# Altium PCB Inc_filter_v1.PcbDoc (part 2 of 4)
Units mil, origin at the board's own origin, x right, y up, seen from the top; angles counter-clockwise.
Board outline 13370 x 13370 mil, 2 copper layers (Top Layer, Bottom Layer); 602 components, 261 nets, 1625 pads, 355 vias.
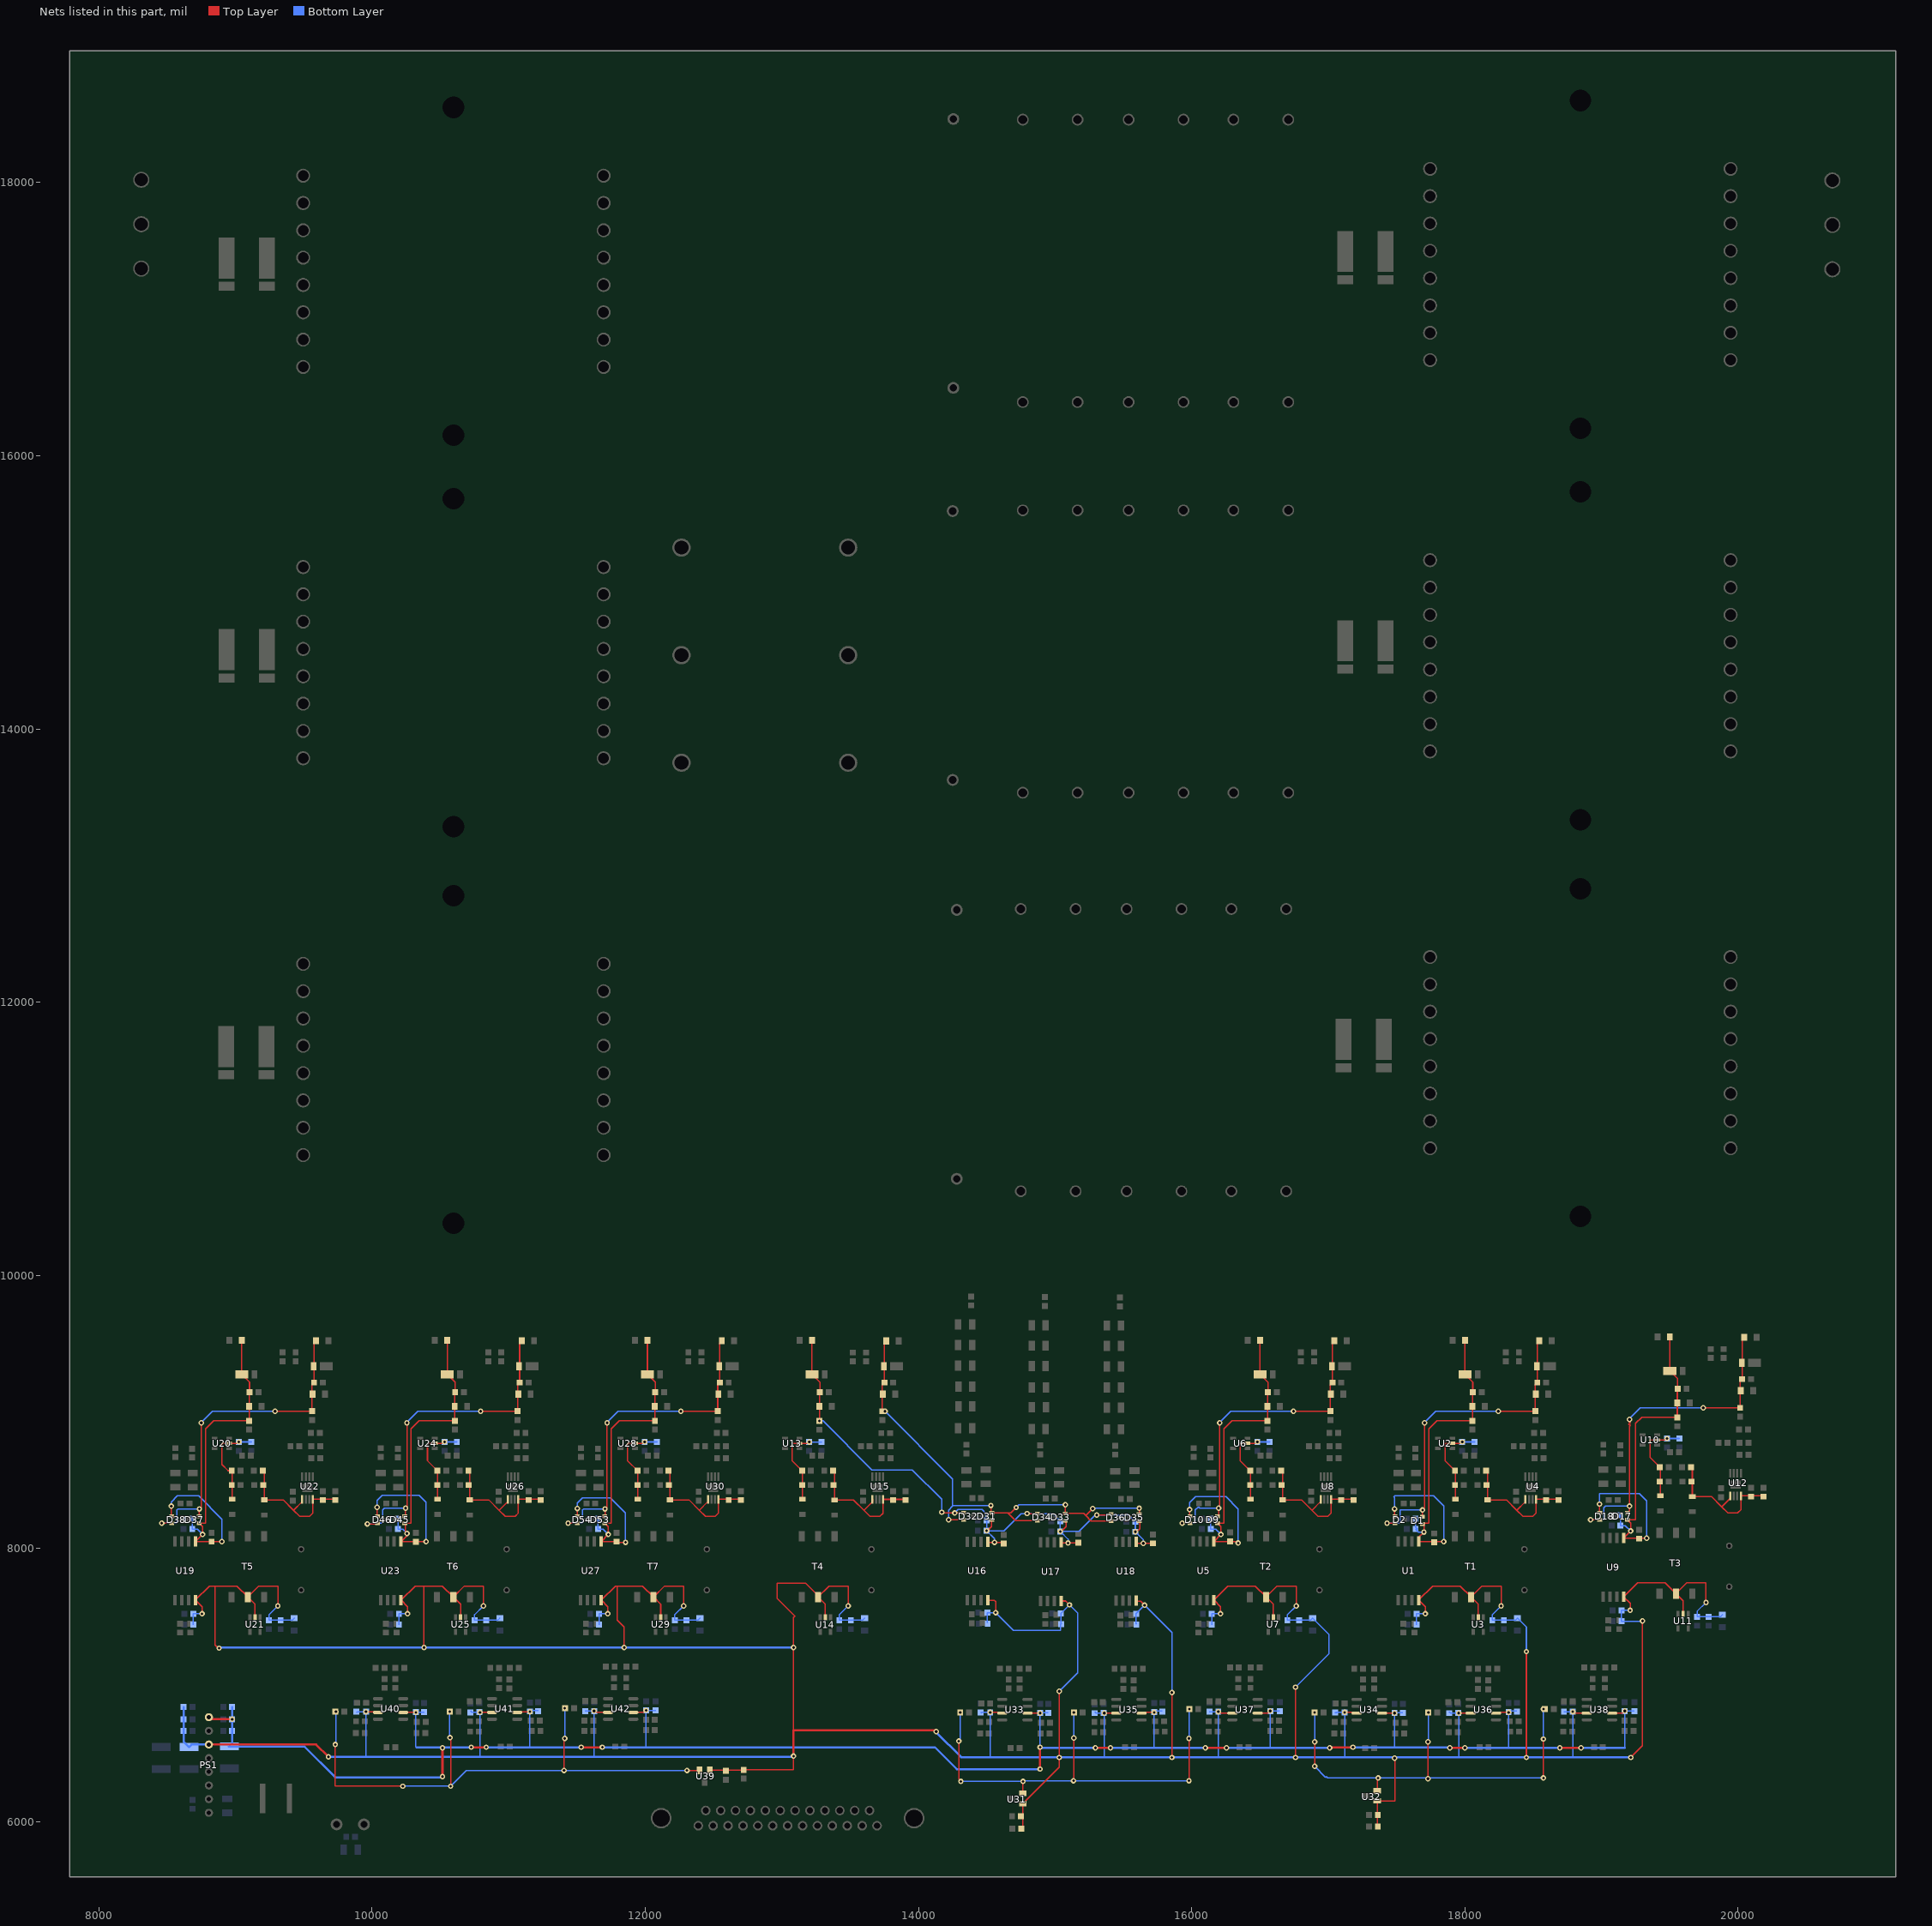
[diagram p2: the nets of this part, all layers, seen from the top]

## Footprints (in the part's own frame and the unit in brackets; to place one, negate y for a bottom-side part, rotate by r counter-clockwise, add the part's x,y. Pads: shape width x height; smd on the part's side, far side on the other; paste and mask are expansions set on the pad) (continued)
"Res Precision CSM3637Z" [mm]
  rect 7.62x2.95 smd: 1(0,0) 4(0,7.47)
  rect 1.68x2.95 smd: 2(5.26,0) 3(5.26,7.47)
  silkscreen extent -4.4,-2 6.6,9.5
SO8_L [mm] "SOIC, 8-Leads, Body 4.9x3.9mm, Pitch 1.27mm, IPC High Density"
  oval 1.9x0.6 smd: 1(-2.35,1.905) 2(-2.35,0.635) 3(-2.35,-0.635) 4(-2.35,-1.905) 5(2.35,-1.905) 6(2.35,-0.635) 7(2.35,0.635) 8(2.35,1.905)
  silkscreen extent -2.47,-2.5 1,2.88, body extent -2,-2.5 2,2.5, height 1.75
SOD-123 [mm]
  rect 0.91x1.22 smd: 1(0,0) 2(2.815,0)
  silkscreen extent 1.14,-0.33 1.5,0.33
SOIC8 [mm]
  rect 0.64x1.905 smd mask+0.076: 1(0,0) 2(1.27,0) 3(2.54,0) 4(3.81,0) 5(3.81,10.9) 6(2.54,10.9) 7(1.27,10.9) 8(0,10.9)
  silkscreen extent -1.3,0.3 4.57,9.6
SOT23-5 [mm] "SOT23-5 for REF2030, TI"
  rect 0.6x1.1 smd: 1(-0.95,-1.35) 2(0,-1.35) 3(0.95,-1.35) 4(0.95,1.35) 5(-0.95,1.35)
  silkscreen extent -2.29,-1.77 1.78,2.03
SOT323_ESD [mm]
  rect 0.7x0.9 smd: 1(-0.65,-1.9) 2(0.65,-1.9) C(0,-0.1)
  silkscreen extent -1.5,-1.6 1.5,-0.3
SOT_23 [mm]
  rect 1x1.4 smd: 1(-0.95,-1.1) 2(0.95,-1.1) 3(0,1.1)
  round 0.4 on Top Overlay: ""(-1.27,0.127)
  silkscreen extent -1.78,-2.16 1.78,2.16, body extent -1.48,-1.28 1.52,0.97, height 1.25
"Terminal Barrier 3PIN" [mm] "OSTYC022150 terminal"
  round 3 hole 2.4: 1(0,0) 2(8.26,0) 3(16.52,0)
  silkscreen extent -5.9,-9.9 22.6,2.7
"Xmr SN6501" [mm] "Xmr SN6501"
  rect 1.9x1.14 smd: 1(0,0) 2(0,-3.05) 3(0,-6.1) 4(11.31,-6.1) 5(11.31,-3.05) 6(11.31,0)
  silkscreen extent 0,-6.7 9.4,1.4

## Part data
C1 C2 C3 C4 C5 C6 C7 C8 C9: "Radial - 4 Leads"
C10 C11 C35 C36 C60 C61 C105 C106 C110 C111 C115 C116 C120 C121 C145 C146 C170 C171: "CAP CER 1UF 50V X5R 0603", part=1276-1860-1-ND
C12 C13 C18 C20 C22 C25 C27 C29 C31 C37 C38 C43 C45 C47 C50 C52 C54 C56 C62 C63 C68 C70 C72 C75 C77 C79 C81 C88 C90 C92 C95 C97 C99 C101 C107 C108 C112 C113 C117 C118 C122 C123 C128 C130 C132 C135 C137 C139 C141 C147 C148 C153 C155 C157 C160 C162 C164 C166 C172 C173 C178 C180 C182 C185 C187 C189 C191 C199 C200 C203 C207 C209 C212 C213 C214 C216 C218 C220 C226 C227 C228 C230 C232 C234 C240 C241 C242 C244 C246 C248 C253 C255 C256 C258 C262 C263 C265 C269 C270 C272 C276: "CAP CER 0.1UF 50V Y5V 0603", part=311-1343-6-ND
C14 C39 C64 C109 C114 C119 C124 C149 C174: "CAP CER 330PF 50V C0G 0603", part=445-7033-2-ND
C15 C40 C65 C85 C125 C150 C175: library part Cap, "CAP CER 1000PF 1KV Y5P RADIAL", LatestRevisionDate=17-Jul-2002, LatestRevisionNote="Re-released for DXP Platform.", PackageDescription="Radial Cap, Thru-Hole; 2 Leads; 0.3 in Pin Spacing", PackageReference=RAD-0.3, part=1251PH-ND, Published=8-Jun-2000, Publisher="Altium Limited"
C16 C19 C21 C24 C26 C28 C33 C41 C44 C46 C49 C51 C53 C58 C66 C69 C71 C74 C76 C78 C83 C86 C89 C91 C94 C96 C98 C103 C126 C129 C131 C134 C136 C138 C143 C151 C154 C156 C159 C161 C163 C168 C176 C179 C181 C184 C186 C188 C193 C202 C205 C206 C208 C215 C217 C219 C221 C229 C231 C233 C235 C243 C245 C247 C249 C252 C257 C259 C264 C266 C271 C273: "CAP CER 10UF 35V X5R 0805", part=490-10515-1-ND
C17 C42 C67 C87 C127 C152 C177: "CAP CER 22UF 35V X5R 0805", part=445-14428-1-ND
C23 C32 C48 C57 C73 C82 C93 C102 C133 C142 C158 C167 C183 C192: "CAP CER 4.7UF 50V X5R 0805", part=445-5980-1-ND
C30 C34 C55 C59 C80 C84 C100 C104 C140 C144 C165 C169 C190 C194: "CAP CER 10000PF 100V X7R 0603", part=478-7418-1-ND
C195 C196 C197: library part "Cap 3kV 220pF", "CAP CER 220PF 3KV C0G 1812", part=445-2380-1-ND
C198 C275: "CAP CER 10UF 50V X5R 1206", part=587-3248-1-ND
C201 C204: "CAP CER 0603 10NF 50V U2J 5%", part=399-13384-1-ND
C210 C211 C222 C223 C224 C225 C236 C237 C238 C239 C250 C251 C254 C260 C261 C267 C268 C274 R106 R107 R110 R111 R112 R113 R116 R118 R122 R123 R126 R127 R128 R129 R132 R134 R138 R139 R142 R143 R144 R145 R148 R150 R153 R155 R156 R158 R161 R163 R164 R166 R169 R171 R172 R174: "NC"
D1 D2 D9 D10 D17 D18 D31 D32 D33 D34 D35 D36 D37 D38 D45 D46 D53 D54: library part Diode_ESD, "TVS DIODE 70VWM 8VC SOT323", part=DESD1P0RFW-7DICT-ND
D3 D6 D11 D14 D19 D22 D25 D28 D39 D42 D47 D50 D55 D58: "DIODE SCHOTTKY 20V 500MA SOD123", part=MBR0520LT1GOSCT-ND
D4 D7 D12 D15 D20 D23 D26 D29 D40 D43 D48 D51 D56 D59: "LED 0805"
D5 D8 D13 D16 D21 D24 D27 D30 D41 D44 D49 D52 D57 D60: "DIODE ZENER POWERDI123"
FB1 FB2 FB3 FB4 FB5 FB6 FB7 FB8 FB9 FB10 FB11 FB12 FB13 FB14 FB15 FB16 FB17 FB18 FB19 FB20 FB21 FB22 FB23 FB24 FB25 FB26 FB27 FB28 FB29: "FERRITE BEAD 1 KOHM 0603 1LN", part=445-8672-1-ND
J1: library part "Conn D-Sub Receptacle 25 positions", "D-Sub Receptacle 25 Position A35111-ND"
L5: library part "CMC 1.5MH 20A", "CMC 1.5MH 20A 3LN TH", part=B82747E6203A40
L8: "FIXED IND 10UH 1.19A 110 MOHM", part=732-1103-1-ND
P1: library part "2 pin Terminal", "2 pin Terminal"
P2 P3: library part "Terminal Blocks - Barrier Blocks", "CONN BARRIER STRIP 3CIRC 0.325\"", part=WM4246-ND
PS1: "DC/DC CONVERTER +/-5V 6W", part=1470-2542-5-ND
R1 R2 R4 R5 R7 R8: "RES SMD 0.02 OHM 0.1% 2W 3637", part=Y1473-.02CCT-ND
R3 R6 R9: "RES 5.0 OHM 10W 1% WW AXIAL", part=RSD-5.0RCT-ND
R10 R19 R28 R41 R53 R65 R77 R86 R95: library part "Resistor 0603", "Resistor 0603"
R11 R14 R20 R23 R29 R32 R44 R52 R56 R64 R68 R76 R78 R81 R87 R90 R96 R99: "12 Ohm ∮0.5% 0.25W, 1/4W Chip Resistor 1206", part=311-2961-1-ND
R12 R13 R21 R22 R30 R31 R45 R48 R57 R60 R69 R72 R79 R80 R88 R89 R97 R98: "RES SMD 10 OHM 0.05% 1/10W 0603", part=RNCF0603AKT10R0CT-ND
R15 R17 R24 R26 R33 R35 R37 R39 R82 R84 R91 R93 R100 R102: "RES SMD 3.9K OHM 5% 1/10W 0603", part=541-3.9KGCT-ND
R16 R25 R34 R38 R83 R92 R101: "RES SMD 3.16K OHM 1% 1/10W 0603", part=311-3.16KHRCT-ND
R18 R27 R36 R40 R85 R94 R103: "RES SMD 11.5K OHM 1% 1/10W 0603", part=541-11.5KHCT-ND
R42 R43 R49 R50 R54 R55 R61 R62 R66 R67 R73 R74: "RES SMD 332K OHM 0.1% 1/4W 1206", part=RG32P332KBCT-ND
R46 R58 R70: "RES SMD 1.13K OHM 0.1% 1/4W 1206", part=P1.13KBCCT-ND
R104 R105 R108 R109 R114 R115 R117 R119 R120 R121 R124 R125 R130 R131 R133 R135 R136 R137 R140 R141 R146 R147 R149 R151 R152 R154 R157 R159 R160 R162 R165 R167 R168 R170 R173 R175: "RES SMD 499 OHM 0.1% 1/10W 0603", part=RG16P499BCT-ND
T1 T2 T3 T4 T5 T6 T7: "TRANSFORMER SMD TR1.7 SN6501", part=1297-1107-1-ND
U1 U5 U9 U16 U17 U18 U19 U23 U27: "IC OPAMP ISOLATION 100KHZ 8SOIC", part=296-38822-5-ND
U2 U6 U10 U13 U20 U24 U28: "IC REG LDO 5V 0.15A SOT23-5", part=296-39287-1-ND
U3 U7 U11 U14 U21 U25 U29: "IC REG CONV PWR SUPPLIES SOT23-5"
U4 U8 U12 U15 U22 U26 U30: "IC REG LDO NEG ADJ 0.2A 8MSOP", part=296-27750-1-ND
U31 U32 U39: "Series Voltage Reference IC ∮0.2% 25mA SOT-23-3", part=ISL21010CFH315Z-TKCT-ND
U33 U34 U35 U36 U37 U38 U40 U41 U42: "IC OPAMP DIFF 360MHZ 8MSOP", part=AD8132WARMZ-R7CT-ND

## Via types
v1: diameter 40, hole 20, Top Layer to Bottom Layer, 355 vias

## Nets (pads, with @x,y where several pads share a name; then routed paths per layer and width w, separated by ;. In a path a pad name is that pad's centre, name@x,y a point inside that pad or via, vN(x,y) a via of type N, cw(c..) or ccw(c..) an arc to the next point about the centre after c; other vN are vias at no path point)
1V5_IL: R107.1 R123.1 R139.1 U32.2 | length 3204.7
  Top Layer w7.87: v1@16900,6410 v1(16900,6585) ; v1@17355,6330 v1(17365,6320) ; U32.2@17358.31,6227.4 v1@17358.31,6320 ; v1(17730,6315) v1(17730,6585) ; v1(18575,6320) v1(18575,6605) ; v1(18575,6825) R139.1@18577.52,6825
  Bottom Layer w7.87: v1(16900,6405) 16980,6325 16985,6330 16995,6320 v1(17365,6320) v1(18575,6320) ; v1(16900,6585) v1(16900,6800) ; v1(17730,6585) 17732.52,6587.52 v1(17732.52,6800) ; v1(18575,6605) v1(18575,6825)
1V5_Io: R153.1 R161.1 R169.1 U39.2 | length 4276.4
  Top Layer w7.87: v1(9730,6565) 9730,6260 v1(10225,6260) ; v1(10570,6615) 10580,6605 10575,6600 v1(10575,6260) ; v1(11405,6375) 11405,6595 11400,6600 v1(11410,6610) ; v1(12305,6375) 12395.98,6375 U39.2@12397.6,6376.61
  Bottom Layer w7.87: v1(9730,6565) 9735.04,6570.04 v1(9735.04,6805) ; v1(10225,6260) v1(10575,6260) 10690,6375 v1(11405,6375) v1(12305,6375) ; v1(10567.56,6805) 10567.56,6617.44 v1(10570,6615) ; v1(11410,6610) v1(11410,6610) v1(11410.04,6830)
1V5_Vo: R106.1 R122.1 R138.1 U31.2 | length 3310.4
  Top Layer w7.87: v1(14295,6590) 14295,6310 v1(14310,6295) ; U31.2@14763.31,6207.4 14765,6209.09 v1(14765,6295) ; v1(15135,6300) 15137.52,6302.52 v1(15137.52,6612.52) ; v1(15980,6300) v1(15980,6610) ; R138.1@15980,6825 v1(15982.52,6825)
  Bottom Layer w7.87: v1(14295,6590) 14305,6600 v1(14305,6800) ; v1(14310,6295) v1(14765,6295) 14770,6300 v1(15135,6300) v1(15980,6300) ; v1(15137.52,6612.52) v1(15137.52,6800) ; v1(15980,6610) 15982.52,6607.48 v1(15982.52,6825)
+5V_LV: C11.1 C13.1 C16.2 C17.2 C18.2 C36.1 C38.1 C41.2 C42.2 C43.2 C61.1 C63.1 C66.2 C67.2 C68.2 C86.2 C87.2 C88.2 C106.1 C108.1 C111.1 C113.1 C116.1 C118.1 C121.1 C123.1 C126.2 C127.2 C128.2 C146.1 C148.1 C151.2 C152.2 C153.2 C171.1 C173.1 C176.2 C177.2 C178.2 C195.2 C200.2 C201.2 C202.2 C206.2 C207.2 C208.2 C209.2 C214.2 C215.2 C216.2 C217.2 C228.2 C229.2 C230.2 C231.2 C242.2 C243.2 C244.2 C245.2 C252.2 C253.2 C256.2 C257.2 C263.2 C264.2 C270.2 C271.2 PS1.6 T1.2 T2.2 T3.2 T4.2 T5.2 T6.2 T7.2 U1.8 U3.2 U5.8 U7.2 U9.8 U11.2 U14.2 U16.8 U17.8 U18.8 U19.8 U21.2 U23.8 U25.2 U27.8 U29.2 U31.1 U32.1 U33.3 U34.3 U35.3 U36.3 U37.3 U38.3 U39.1 U40.3 U41.3 U42.3 | length 42458.4
  Top Layer w7.87: v1(8754.72,7521.96) 8754.72,7573.96 U19.8@8706.72,7621.96 8809.76,7725 8850,7725 ; v1(8880,7270) 8880,7265 8850,7295 8850,7725 ; T5.2@9090,7645 9010,7725 8850,7725 ; v1(9955.04,6805) 10037.52,6805 U40.3@10042.52,6800 ; v1(10259.72,7521.96) 10259.72,7573.96 U23.8@10211.72,7621.96 10314.76,7725 10375,7725 ; v1(10380,7275) 10380,7720 10375,7725 ; T6.2@10595,7645 10515,7725 10375,7725 ; v1(10790.04,6800) U41.3@10877.52,6800 ; v1(11625.04,6810) 11635.04,6800 U42.3@11727.52,6800 ; v1(11725,7521.96) 11725,7573.96 U27.8@11677,7621.96 11780.04,7725 11795,7725 ; v1(11845,7275) 11845,7425 11795,7475 11795,7725 ; T7.2@12060.28,7645 11980.28,7725 11795,7725 ; v1(14525,6800) 14607.48,6800 U33.3@14612.48,6795 ; v1(15360,6795) U35.3@15447.48,6795 ; v1(16195,6805) 16205,6795 U37.3@16297.48,6795 ; v1(16210,7521.96) 16210,7573.96 U5.8@16162,7621.96 16265.04,7725 16465.28,7725 T2.2@16545.28,7645 ; v1(17120,6800) 17202.48,6800 U34.3@17207.48,6795 ; v1(17710,7521.96) 17710,7573.96 U1.8@17662,7621.96 17765.04,7725 17965.28,7725 T1.2@18045.28,7645 ; v1(17955,6795) U36.3@18042.48,6795 ; v1(18790,6805) 18800,6795 U38.3@18892.48,6795 ; v1(19209.72,7546.96) 19209.72,7598.96 U9.8@19161.72,7646.96 19264.76,7750 19465,7750 T3.2@19545,7670 ; v1(19215,6470) 19300,6555 v1(19300,7470)
  Top Layer w10: U21.2@9142.6,7496.3 9142.6,7592.4 T5.2@9090,7645 9170,7725 9310,7725 v1(9310,7580) ; U25.2@10647.6,7496.3 10647.6,7592.4 T6.2@10595,7645 10675,7725 10815,7725 v1(10815,7580) ; U29.2@12112.87,7496.3 12112.87,7592.4 T7.2@12060.28,7645 12140.28,7725 12280.28,7725 v1(12280.28,7580) ; U39.1@12472.4,6376.61 12705.87,6376.61 C253.2@12720,6362.48 ; C253.2@12720,6380 13085,6380 v1(13085,6480) ; 13085,6670 v1(13085,7275) 13085,7495 13095,7505 12965,7635 12965,7745 13175,7745 13265,7655 T4.2@13265,7644.72 ; U14.2@13317.6,7496.02 13317.6,7592.13 T4.2@13265,7644.72 ; v1(13485,7579.72) 13485,7724.72 13345,7724.72 T4.2@13265,7644.72 ; v1@14120,6670 v1(14130,6660) ; U16.8@14506.18,7620.87 14555,7620.87 14565,7610.87 v1(14565,7530) ; C207.2@14752.48,5950 14763.31,5960.83 U31.1@14763.31,6132.6 15030,6399.29 v1(15030,6470) v1(15030,6955) ; U17.8@15044.96,7615.83 15076.61,7615.83 v1(15104.96,7587.48) ; U18.8@15595,7613.35 15626.65,7613.35 v1(15655,7585) ; v1(15855,6470) v1(15855,6945) ; U7.2@16597.87,7496.3 16597.87,7592.4 T2.2@16545.28,7645 16625.28,7725 16765.28,7725 v1(16765.28,7580) ; v1(16760,6470) v1(16760,6985) ; C209.2@17362.48,5965 17358.31,5969.17 U32.1@17358.31,6152.6 17487.6,6152.6 17487.6,6462.4 v1(17485,6465) ; U3.2@18097.87,7496.3 18097.87,7592.4 T1.2@18045.28,7645 18125.28,7725 18265.28,7725 v1(18265.28,7580) ; v1(18450,6470) v1(18450,7245) ; U11.2@19597.6,7521.3 19597.6,7617.4 T3.2@19545,7670 19625,7750 19765,7750 v1(19765,7605)
  Top Layer w15.75: PS1.6@8805,6565 9590,6565 v1(9680,6475) ; v1(13085,6480) 13085,6670 v1@14120,6670
  Bottom Layer w7.87: C121.1@8691.2,7441.96 C123.1@8691.2,7521.96 v1(8754.72,7521.96) ; C256.2@9885.04,6805 9890.04,6800 9895.04,6805 v1(9955.04,6805) 9955.04,6475 ; C146.1@10196.2,7441.96 C148.1@10196.2,7521.96 v1(10259.72,7521.96) ; C263.2@10720.04,6810 10730.04,6800 v1(10790.04,6800) 10790.04,6475 ; C270.2@11560.04,6810 v1(11625.04,6810) 11625.04,6475 ; C171.1@11661.48,7441.96 C173.1@11661.48,7521.96 v1(11725,7521.96) ; C214.2@14455,6800 14460,6795 14465,6800 v1(14525,6800) 14525,6470 ; C108.1@14503.66,7530 v1(14565,7530) 14695,7400 15040,7400 15040,7445 C111.1@15044.96,7449.96 ; C228.2@15290,6805 15300,6795 v1(15360,6795) 15360,6470 ; C242.2@16130,6805 v1(16195,6805) 16195,6470 ; C36.1@16146.48,7441.96 C38.1@16146.48,7521.96 v1(16210,7521.96) ; C216.2@17050,6800 17055,6795 17060,6800 v1(17120,6800) 17120,6470 ; C11.1@17646.48,7441.96 C13.1@17646.48,7521.96 v1(17710,7521.96) ; C230.2@17885,6805 17895,6795 v1(17955,6795) 17955,6470 ; C244.2@18725,6805 v1(18790,6805) 18790,6470 ; v1(19209.72,7546.96) C63.1@19146.2,7546.96 C61.1@19146.2,7466.96 19296.96,7466.96 v1(19300,7470)
  Bottom Layer w10: v1(9310,7580) 9245,7515 C128.2@9245,7474.96 C126.2@9330,7474.96 9414.68,7474.96 C127.2@9430,7490.28 ; v1(10815,7580) 10750,7515 C153.2@10750,7474.96 C151.2@10835,7474.96 10919.68,7474.96 C152.2@10935,7490.28 ; v1(12280.28,7580) 12215.28,7515 C178.2@12215.28,7474.96 C176.2@12300.28,7474.96 12384.96,7474.96 C177.2@12400.28,7490.28 ; v1(13085,6480) v1@13090,6475 ; v1(13485,7579.72) 13420,7514.72 C88.2@13420,7474.69 C86.2@13505,7474.69 13589.68,7474.69 C87.2@13605,7490 ; C106.1@14503.66,7457.52 C108.1@14503.66,7530 ; v1(15030,6955) 15165,7090 15165,7527.44 v1(15104.96,7587.48) C113.1@15042.44,7524.96 15042.44,7452.48 C111.1@15044.96,7449.96 ; C116.1@15595,7447.48 15592.48,7450 C118.1@15592.48,7522.48 v1(15655,7585) 15855,7385 v1(15855,6945) ; v1(16760,6985) 17005,7230 17005,7370.55 C42.2@16885.28,7490.28 16869.96,7474.96 C41.2@16785.28,7474.96 C43.2@16700.28,7474.96 16700.28,7515 v1(16765.28,7580) ; v1(18265.28,7580) 18200.28,7515 C18.2@18200.28,7474.96 C16.2@18285.28,7474.96 18369.96,7474.96 C17.2@18385.28,7490.28 18450,7425.55 v1(18450,7245) ; v1(19765,7605) 19700,7540 C68.2@19700,7499.96 C66.2@19785,7499.96 19869.69,7499.96 C67.2@19885,7515.28
  Bottom Layer w15.75: C200.2@8620,6840 C202.2@8620,6750 C201.2@8620,6665 8620,6586.42 C195.2@8660,6546.42 8678.58,6565 PS1.6@8805,6565 PS1.6@8790,6550 ; v1(8880,7270) 8885,7275 v1(10380,7275) v1(11845,7275) v1(13085,7275) ; v1(9680,6475) 9955.04,6475 10790.04,6475 11625.04,6475 v1@13090,6475 ; v1@14135,6650 14310,6475 14310,6470 14525,6470 v1(15030,6470) 15360,6470 v1(15855,6470) 16195,6470 v1(16760,6470) 17120,6470 17955,6470 v1(18450,6470) 18790,6470 v1(19215,6470)
+5V_PH: C92.2 C93.2 C105.2 C107.2 C110.2 C112.2 C115.2 C117.2 D26.A D27.1 D31.1 D32.1 D33.1 D34.1 D35.1 D36.1 FB13.2 R41.2 R53.2 R65.2 U16.1 U17.1 U18.1 | length 4980.1
  Top Layer w7.87: v1(14170,8265) 14175,8260 v1(14265,8260) D32.1@14325,8260 ; v1(14498.66,8130) 14504.72,8130 14535.87,8161.14 D31.1@14535.87,8209.41 ; v1(14795,8255.59) D34.1@14869.13,8255.59 ; v1(15037.44,8124.96) 15045.04,8124.96 15080,8159.92 15080,8189.92 15069.96,8199.96 D33.1@15075,8205 ; v1(15305,8245) 15401.06,8245 D36.1@15409.13,8253.07 ; v1(15587.48,8122.48) 15597.48,8122.48 15620,8145 15620,8197.76 D35.1@15615.87,8201.89
  Top Layer w10: D26.A@13220.28,9524.72 13220,9524.45 D27.1@13220,9274.72 13277.52,9217.2 C92.2@13277.52,9144.72 13275,9142.2 v1(13275,8934.68) ; U16.1@14506.18,8050 14506.18,8035 14516.18,8045 v1(14556.18,8045) R41.2@14616.22,8045 ; U17.1@15044.96,8044.96 15044.96,8029.96 15054.96,8039.96 v1(15094.96,8039.96) R53.2@15155,8039.96 ; U18.1@15595,8042.48 15595,8027.48 15605,8037.48 v1(15645,8037.48) R65.2@15705.04,8037.48
  Bottom Layer w7.87: v1(13275,8934.68) 13300.32,8934.68 13660,8575 13954.72,8575 14170,8359.72 v1(14170,8265) ; v1(14265,8260) 14290,8285 14465,8285 14495,8255 14495,8208.66 C107.2@14498.66,8205 ; v1(14498.66,8130) 14625,8130 14750.59,8255.59 v1(14795,8255.59) 14981.81,8255.59 C112.2@15037.44,8199.96 ; v1(15037.44,8124.96) 15175.04,8124.96 15295,8244.92 15299.92,8240 15304.92,8245 v1(15305,8245) 15539.96,8245 C117.2@15587.48,8197.48 ; v1(15587.48,8122.48) C115.2@15595,8130
  Bottom Layer w10: C107.2@14498.66,8205 v1(14498.66,8130) 14556.18,8072.48 v1(14556.18,8045) ; C112.2@15037.44,8199.96 v1(15037.44,8124.96) 15094.96,8067.44 v1(15094.96,8039.96) ; C117.2@15587.48,8197.48 v1(15587.48,8122.48) 15645,8064.96 v1(15645,8037.48)
+5V_USH1: C35.2 C37.2 C47.2 C48.2 D9.1 D10.1 D12.A D13.1 FB7.2 R19.2 U5.1 | length 2973.1
  Top Layer w7.87: v1(15985,8285) 15985,8237.69 D10.1@15987.13,8235.55 ; v1(16340,8040) 16330.04,8049.96 16270,8049.96 16268.87,8051.09 U5.1@16162,8051.09 v1(16214,8103.09) 16214,8159.24 D9.1@16188.87,8184.37 16235,8184.37 16235,8875 16294.96,8934.96 FB7.2@16555.28,8934.96
  Top Layer w10: D12.A@16500.55,9525 16500.28,9524.72 D13.1@16500.28,9275 16557.8,9217.48 C47.2@16557.8,9145 16555.28,9142.48 FB7.2@16555.28,8934.96
  Bottom Layer w7.87: v1(15985,8285) 15985,8335 16030,8380 16250,8380 16340,8290 v1(16340,8040) ; C35.2@16138.96,8217.96 C37.2@16138.96,8141.96 16175.13,8141.96 v1(16214,8103.09)
+5V_USH2: C120.2 C122.2 C132.2 C133.2 D37.1 D38.1 D40.A D41.1 FB20.2 R77.2 U19.1 | length 2956.6
  Top Layer w7.87: v1(8530,8310) 8530,8237.41 D38.1@8531.86,8235.55 ; v1(8900,8050) 8824.68,8050 8819.68,8045 8813.59,8051.09 U19.1@8706.72,8051.09 v1(8758.72,8103.09) 8758.72,8159.24 D37.1@8733.59,8184.37 8780,8184.37 8780,8875.28 8839.68,8934.96 FB20.2@9100,8934.96
  Top Layer w10: D40.A@9045.28,9525 9045,9524.72 D41.1@9045,9275 9102.52,9217.48 C132.2@9102.52,9145 9100,9142.48 FB20.2@9100,8934.96
  Bottom Layer w7.87: v1(8530,8310) 8530,8340 8575,8385 8730,8385 8900,8215 v1(8900,8050) ; C120.2@8683.68,8217.96 C122.2@8683.68,8141.96 8719.86,8141.96 v1(8758.72,8103.09)
+5V_VSH1: C10.2 C12.2 C22.2 C23.2 D1.1 D2.1 D4.A D5.1 FB3.2 R10.2 U1.1 | length 3009.7
  Top Layer w7.87: v1(17485,8290) 17485,8237.69 D2.1@17487.13,8235.55 ; v1(17845,8050) 17770.04,8050 17770,8049.96 17768.87,8051.09 U1.1@17662,8051.09 17662,8082 v1(17700,8120) 17700,8180 17696.62,8176.62 17691.62,8181.62 17688.87,8184.37 17735,8184.37 17735,8875 17794.96,8934.96 FB3.2@18055.28,8934.96
  Top Layer w10: D4.A@18000.55,9525 18000.28,9524.72 D5.1@18000.28,9275 18057.8,9217.48 C22.2@18057.8,9145 18055.28,9142.48 FB3.2@18055.28,8934.96
  Bottom Layer w7.87: v1(17485,8290) 17485,8372.87 17480,8377.87 17487.13,8385 17770,8385 17845,8310 v1(17845,8050) ; C10.2@17638.96,8217.96 17638.96,8156.54 17653.54,8141.96 17640,8141.96 17661.96,8120 v1(17700,8120)
+5V_VSH2: C145.2 C147.2 C157.2 C158.2 D45.1 D46.1 D48.A D49.1 FB24.2 R86.2 U23.1 | length 2997.8
  Top Layer w7.87: D46.1@10036.86,8235.55 v1(10036.86,8301.86) ; R86.2@10310,8045 10315,8050 v1(10395,8050) ; R86.2@10310,8051.09 U23.1@10211.72,8051.09 10255,8094.37 v1(10255,8110) 10245,8120 10245,8177.96 D45.1@10238.59,8184.37 10284.72,8184.37 10284.72,8875 10344.68,8934.96 FB24.2@10605,8934.96
  Top Layer w10: D48.A@10550.28,9525 10550,9524.72 D49.1@10550,9275 10607.52,9217.48 C157.2@10607.52,9145 10605,9142.48 FB24.2@10605,8934.96
  Bottom Layer w7.87: v1(10036.86,8301.86) 10036.86,8351.86 10075,8390 10345,8390 10395,8340 v1(10395,8050) ; C145.2@10188.68,8217.96 C147.2@10188.68,8141.96 10224.86,8141.96 10255,8111.82 v1(10255,8110)
+5V_WSH1: C60.2 C62.2 C72.2 C73.2 D17.1 D18.1 D20.A D21.1 FB11.2 R28.2 U9.1 | length 2991.3
  Top Layer w7.87: v1(18985,8325) 18985,8262.41 D18.1@18986.86,8260.55 ; v1(19330,8075) 19269.76,8075 19269.72,8074.96 19268.59,8076.09 U9.1@19161.72,8076.09 v1(19213.72,8128.09) 19213.72,8184.24 D17.1@19188.59,8209.37 19250,8209.37 19250,8915.28 19294.69,8959.96 FB11.2@19555,8959.96
  Top Layer w10: D20.A@19500.28,9550 19500,9549.72 D21.1@19500,9300 19557.52,9242.48 C72.2@19557.52,9170 19555,9167.48 FB11.2@19555,8959.96
  Bottom Layer w7.87: v1(18985,8325) 18985,8401.28 18986.86,8403.14 19276.86,8403.14 19330,8350 v1(19330,8075) ; C60.2@19138.69,8242.96 C62.2@19138.69,8166.96 19174.86,8166.96 v1(19213.72,8128.09)
+5V_WSH2: C170.2 C172.2 C182.2 C183.2 D53.1 D54.1 D56.A D57.1 FB28.2 R95.2 U27.1 | length 2935.5
  Top Layer w7.87: D54.1@11502.13,8235.55 v1(11502.13,8292.87) ; R95.2@11785,8049.96 R95.2@11785.04,8050 ; v1(11855,8045) 11790.04,8045 R95.2@11785.04,8050 ; FB28.2@12070.28,8934.96 11809.96,8934.96 11750,8875 11750,8184.37 D53.1@11703.87,8184.37 11729,8159.24 v1(11729,8103.09) U27.1@11677,8051.09 11678.09,8050 R95.2@11785.04,8050
  Top Layer w10: D56.A@12015.55,9525 12015.28,9524.72 D57.1@12015.28,9275 12072.8,9217.48 C182.2@12072.8,9145 12070.28,9142.48 FB28.2@12070.28,8934.96
  Bottom Layer w7.87: v1(11502.13,8292.87) 11502.13,8332.13 11540,8370 11745,8370 11855,8260 v1(11855,8045) ; C170.2@11653.96,8217.96 C172.2@11653.96,8141.96 11690.13,8141.96 v1(11729,8103.09)
+6V_PH: C89.2 C90.2 C96.2 C97.2 D25.2 U13.2 | length 659.4
  Top Layer w10: D25.2@13150,8360.55 13150,8567.24 C90.2@13147.52,8569.72 13075,8642.24 13075,8769.72 U13.2@13128.15,8769.72 13190,8769.72 v1(13200,8779.72)
  Bottom Layer w10: v1(13200,8779.72) C97.2@13290,8779.72
+6V_USH1: C44.2 C45.2 C51.2 C52.2 D11.2 U6.2 | length 659.4
  Top Layer w10: D11.2@16430.28,8360.83 16430.28,8567.52 C45.2@16427.8,8570 16355.28,8642.52 16355.28,8770 U6.2@16408.43,8770 16470.28,8770 v1(16480.28,8780)
  Bottom Layer w10: v1(16480.28,8780) C52.2@16570.28,8780
+6V_USH2: C129.2 C130.2 C136.2 C137.2 D39.2 U20.2 | length 675.5
  Top Layer w10: D39.2@8975,8360.83 8975,8567.52 C130.2@8972.52,8570 8945,8570 8900,8615 8900,8770 U20.2@8953.15,8770 9015,8770 v1(9025,8780)
  Bottom Layer w10: v1(9025,8780) C137.2@9115,8780
+6V_VSH1: C19.2 C20.2 C26.2 C27.2 D3.2 U2.2 | length 659.4
  Top Layer w10: D3.2@17930.28,8360.83 17930.28,8567.52 C20.2@17927.8,8570 17855.28,8642.52 17855.28,8770 U2.2@17908.43,8770 17970.28,8770 v1(17980.28,8780)
  Bottom Layer w10: v1(17980.28,8780) C27.2@18070.28,8780
+6V_VSH2: C154.2 C155.2 C161.2 C162.2 D47.2 U24.2 | length 659.4
  Top Layer w10: D47.2@10480,8360.83 10480,8567.52 C155.2@10477.52,8570 10405,8642.52 10405,8770 U24.2@10458.15,8770 10520,8770 v1(10530,8780)
  Bottom Layer w10: v1(10530,8780) C162.2@10620,8780
+6V_WSH1: C69.2 C70.2 C76.2 C77.2 D19.2 U10.2 | length 659.4
  Top Layer w10: D19.2@19430,8385.83 19430,8592.52 C70.2@19427.52,8595 19355,8667.52 19355,8795 U10.2@19408.15,8795 19470,8795 v1(19480,8805)
  Bottom Layer w10: v1(19480,8805) C77.2@19570,8805
+6V_WSH2: C179.2 C180.2 C186.2 C187.2 D55.2 U28.2 | length 659.4
  Top Layer w10: D55.2@11945.28,8360.83 11945.28,8567.52 C180.2@11942.8,8570 11870.28,8642.52 11870.28,8770 U28.2@11923.43,8770 11985.28,8770 v1(11995.28,8780)
  Bottom Layer w10: v1(11995.28,8780) C187.2@12085.28,8780
-5V_LV: C196.2 C203.1 C204.1 C205.1 C218.1 C219.1 C220.1 C221.1 C232.1 C233.1 C234.1 C235.1 C246.1 C247.1 C248.1 C249.1 C258.1 C259.1 C265.1 C266.1 C272.1 C273.1 PS1.8 U33.6 U34.6 U35.6 U36.6 U37.6 U38.6 U40.6 U41.6 U42.6 | length 15226.8
  Top Layer w7.87: PS1.8@8805,6765 PS1.8@8820,6750 ; U40.6@10227.56,6800 v1(10320.04,6800) ; U41.6@11062.56,6800 11082.56,6800 11087.56,6805 v1(11155.04,6805) ; U42.6@11912.56,6800 11990.04,6800 v1(12005.04,6815) ; U33.6@14797.52,6795 v1(14890,6795) ; U35.6@15632.52,6795 15652.52,6795 15657.52,6800 v1(15725,6800) ; U37.6@16482.52,6795 16560,6795 v1(16575,6810) ; v1(17010,6540) v1@17015,6545 ; U34.6@17392.52,6795 v1(17485,6795) ; U36.6@18227.52,6795 18247.52,6795 18252.52,6800 v1(18320,6800) ; U38.6@19077.52,6795 19155,6795 v1(19170,6810)
  Top Layer w15.75: PS1.8@8820,6750 v1(8974.96,6750) ; v1(10515,6330) v1(10515,6540) ; v1(10725.04,6545) v1(10835.04,6545) ; v1(11530.04,6545) v1(11685.04,6545) ; v1(14890,6385) v1(14890,6545) ; v1(15295,6540) v1(15405,6540) ; v1(16100,6540) v1(16255,6540) ; v1@17015,6545 v1(17180,6545) ; v1(17890,6540) v1(18000,6540) ; v1(18695,6540) v1(18850,6540)
  Bottom Layer w7.87: C196.2@8950,6550 C196.2@8974.96,6574.96 ; C204.1@8974.96,6840 C204.1@8974.96,6840 ; 10325.04,6545 10320.04,6550 v1(10320.04,6800) 10317.52,6800 C258.1@10320.04,6802.52 C259.1@10380.04,6802.52 ; 11155.04,6545 v1(11155.04,6805) ; C265.1@11155.04,6815 C266.1@11215.04,6815 ; 12005.04,6545 v1(12005.04,6815) C272.1@12075.04,6815 ; v1@14895,6540 v1(14890,6545) v1(14890,6795) 14887.48,6795 C218.1@14890,6797.52 C219.1@14950,6797.52 ; 15725,6540 v1(15725,6800) ; C232.1@15725,6810 C233.1@15785,6810 ; 16575,6540 v1(16575,6810) C246.1@16645,6810 ; 17485,6545 v1(17485,6795) 17482.48,6795 C220.1@17485,6797.52 C221.1@17545,6797.52 ; 18320,6540 v1(18320,6800) ; C234.1@18320,6810 C235.1@18380,6810 ; 19170,6540 v1(19170,6810) C248.1@19240,6810
  Bottom Layer w15.75: C196.2@8950,6550 9505,6550 9730,6325 10515,6325 v1(10515,6330) ; C196.2@8974.96,6574.96 C203.1@8974.96,6665 v1(8974.96,6750) ; v1(8974.96,6750) C204.1@8974.96,6840 ; 10325.04,6545 v1@10510,6545 ; v1(10515,6540) v1@10510,6545 ; v1(10725.04,6545) v1@10510,6545 ; v1(10835.04,6545) 11155.04,6545 v1(11530.04,6545) ; v1(11685.04,6545) 12005.04,6545 14120,6545 14280,6385 v1(14890,6385) ; v1@14895,6540 v1(15295,6540) ; v1(15405,6540) 15725,6540 v1(16100,6540) ; v1(16255,6540) 16575,6540 v1(17010,6540) ; v1(17180,6545) 17485,6545 17885,6545 v1(17890,6540) ; v1(18000,6540) 18320,6540 v1(18695,6540) ; v1(18850,6540) 19170,6540
-5V_PH: C101.2 C102.2 D29.K D30.2 D31.2 D32.2 D33.2 D34.2 D35.2 D36.2 FB14.2 | length 3685.7
  Top Layer w7.87: FB14.2@13735,9004.68 v1(13755.32,9004.68) ; v1(14220,8210) D32.2@14330,8210 ; v1(14530,8315) 14530,8266.46 D31.2@14535.87,8260.59 14654.41,8260.59 ; v1(14715,8300) 14675.59,8260.59 14654.41,8260.59 ; D34.2@14869.13,8204.41 14710.59,8204.41 14654.41,8260.59 ; v1(15075,8320) D33.2@15075,8256.18 15208.82,8256.18 15223.82,8241.18 ; v1(15275,8292.36) 15223.82,8241.18 ; D36.2@15409.13,8201.89 15263.11,8201.89 15223.82,8241.18 ; D35.2@15615.87,8253.07 v1(15615.87,8294.13)
  Top Layer w10: FB14.2@13735,9004.68 13735,9199.68 C101.2@13750.04,9214.72 13750.04,9505.32 D29.K@13764.45,9519.72
  Bottom Layer w7.87: v1(13755.32,9004.68) 14250,8510 14250,8310 ; v1(14220,8210) 14220,8280 14250,8310 ; v1(14530,8315) 14255,8315 14250,8310 ; v1(14715,8300) 14735,8320 v1(15075,8320) ; v1(15275,8292.36) 15276.77,8294.13 v1(15615.87,8294.13)
-5V_USH1: C56.2 C57.2 D9.2 D10.2 D15.K D16.2 FB8.2 | length 2510.1
  Top Layer w7.87: v1(15930,8185) 15974.5,8185 D10.2@15973.54,8185.96 ; D9.2@16188.87,8235.55 16196.96,8243.65 v1(16196.96,8295) 16196.96,8305 16205,8296.96 v1(16205,8920) ; v1(16744.96,9004.96) FB8.2@17015.28,9004.96
  Top Layer w10: FB8.2@17015.28,9004.96 17015.28,9199.96 C56.2@17030.31,9215 17030.31,9505.59 D15.K@17044.72,9520
  Bottom Layer w7.87: v1(15930,8185) 15974.5,8185 15973.54,8185.96 16018,8185.96 16026,8193.96 16026,8281.96 16049.04,8305 16059.04,8295 v1(16196.96,8295) ; v1(16205,8920) 16200,8920 16284.96,9004.96 v1(16744.96,9004.96)
-5V_USH2: C141.2 C142.2 D37.2 D38.2 D43.K D44.2 FB21.2 | length 2510.9
  Top Layer w7.87: v1(8460,8185) 8519.23,8185 D38.2@8518.27,8185.96 ; D37.2@8733.59,8235.55 8735,8236.96 v1(8735,8290) 8742.76,8290 8749.72,8296.96 v1(8749.72,8920) ; v1(9289.68,9004.96) FB21.2@9560,9004.96
  Top Layer w10: FB21.2@9560,9004.96 9560,9199.96 C141.2@9575.04,9215 9575.04,9505.59 D43.K@9589.45,9520
  Bottom Layer w7.87: v1(8460,8185) 8519.23,8185 8518.27,8185.96 8562.72,8185.96 8570.72,8193.96 8570.72,8281.96 8578.76,8290 v1(8735,8290) ; v1(8749.72,8920) 8744.72,8920 8829.68,9004.96 v1(9289.68,9004.96)
-5V_VSH1: C31.2 C32.2 D1.2 D2.2 D7.K D8.2 FB4.2 | length 2473.3
  Top Layer w7.87: v1(17430,8185) 17474.5,8185 D2.2@17473.54,8185.96 ; D1.2@17688.87,8235.55 17690,8236.69 v1(17690,8281.96) 17705,8296.96 v1(17705,8920) ; v1(18244.96,9004.96) FB4.2@18515.28,9004.96
  Top Layer w10: FB4.2@18515.28,9004.96 18515.28,9199.96 C31.2@18530.31,9215 18530.31,9505.59 D7.K@18544.72,9520
  Bottom Layer w7.87: v1(17430,8185) 17474.5,8185 17473.54,8185.96 17518,8185.96 17526,8193.96 17526,8281.96 v1(17690,8281.96) ; v1(17705,8920) 17700,8920 17784.96,9004.96 v1(18244.96,9004.96)
-5V_VSH2: C166.2 C167.2 D45.2 D46.2 D51.K D52.2 FB25.2 | length 2522.1
  Top Layer w7.87: v1(9965,8180) 10019.23,8180 10024.23,8185 D46.2@10023.27,8185.96 ; D45.2@10238.59,8235.55 10245,8241.96 v1(10245,8295) 10252.76,8295 10254.72,8296.96 v1(10254.72,8920) ; v1(10794.68,9004.96) FB25.2@11065,9004.96
  Top Layer w10: FB25.2@11065,9004.96 11065,9199.96 C166.2@11080.04,9215 11080.04,9505.59 D51.K@11094.45,9520
  Bottom Layer w7.87: v1(9965,8180) 10019.23,8180 10024.23,8185 10023.27,8185.96 10067.72,8185.96 10075.72,8193.96 10075.72,8281.96 10088.76,8295 v1(10245,8295) ; v1(10254.72,8920) 10249.72,8920 10334.68,9004.96 v1(10794.68,9004.96)
-5V_WSH1: C81.2 C82.2 D17.2 D18.2 D23.K D24.2 FB12.2 | length 2529
  Top Layer w7.87: v1(18920,8210) 18974.23,8210 D18.2@18973.27,8210.96 ; D17.2@19188.59,8260.55 19196.52,8268.48 19205,8276.96 v1(19205,8310) 19205,8895.28 19210,8900.28 19200,8910.28 19210,8920.28 19195,8935.28 v1(19204.72,8945) ; v1(19744.69,9029.96) FB12.2@20015,9029.96
  Top Layer w10: FB12.2@20015,9029.96 20015,9224.96 C81.2@20030.04,9240 20030.04,9530.59 D23.K@20044.45,9545
  Bottom Layer w7.87: v1(18920,8210) 18974.23,8210 18973.27,8210.96 19017.72,8210.96 19017.72,8297.28 19030.45,8310 v1(19205,8310) ; v1(19204.72,8945) 19199.72,8945 19284.69,9029.96 v1(19744.69,9029.96)
-5V_WSH2: C191.2 C192.2 D53.2 D54.2 D59.K D60.2 FB29.2 | length 2501.4
  Top Layer w7.87: v1(11435,8185) 11489.5,8185 D54.2@11488.54,8185.96 ; D53.2@11703.87,8235.55 11705,8236.69 v1(11705,8290) 11713.04,8290 11720,8296.96 v1(11720,8920) ; v1(12259.96,9004.96) FB29.2@12530.28,9004.96
  Top Layer w10: FB29.2@12530.28,9004.96 12530.28,9199.96 C191.2@12545.32,9215 12545.32,9505.59 D59.K@12559.72,9520
  Bottom Layer w7.87: v1(11435,8185) 11489.5,8185 11488.54,8185.96 11533,8185.96 11541,8193.96 11541,8281.96 11549.04,8290 v1(11705,8290) ; v1(11720,8920) 11715,8920 11799.96,9004.96 v1(12259.96,9004.96)
-6V_PH: C94.1 C95.1 C98.2 C99.2 D28.1 U15.5 U15.8 | length 1007.9
  Top Layer w10: C95.1@13375,8569.72 13385,8559.72 D28.1@13385,8355.55 13524.17,8355.55 13600,8279.72 ; U15.5@13663.23,8359.72 13663.23,8342.95 13600,8279.72 ; C99.2@13905,8354.76 13900.04,8359.72 U15.8@13740,8359.72 13740,8258.16 13716.57,8234.72 13645,8234.72 13600,8279.72
-6V_USH1: C49.1 C50.1 C53.2 C54.2 D14.1 U8.5 U8.8 | length 1007.9
  Top Layer w10: C50.1@16655.28,8570 16665.28,8560 D14.1@16665.28,8355.83 16804.45,8355.83 16880.28,8280 ; U8.5@16943.5,8360 16943.5,8343.23 16880.28,8280 ; C54.2@17185.28,8355.04 17180.31,8360 U8.8@17020.28,8360 17020.28,8258.43 16996.84,8235 16925.28,8235 16880.28,8280
-6V_USH2: C134.1 C135.1 C138.2 C139.2 D42.1 U22.5 U22.8 | length 1007.9
  Top Layer w10: C135.1@9200,8570 9210,8560 D42.1@9210,8355.83 9349.17,8355.83 9425,8280 ; U22.5@9488.23,8360 9488.23,8343.23 9425,8280 ; C139.2@9730,8355.04 9725.04,8360 U22.8@9565,8360 9565,8258.43 9541.57,8235 9470,8235 9425,8280
-6V_VSH1: C24.1 C25.1 C28.2 C29.2 D6.1 U4.5 U4.8 | length 1007.9
  Top Layer w10: C25.1@18155.28,8570 18165.28,8560 D6.1@18165.28,8355.83 18304.45,8355.83 18380.28,8280 ; U4.5@18443.5,8360 18443.5,8343.23 18380.28,8280 ; C29.2@18685.28,8355.04 18680.31,8360 U4.8@18520.28,8360 18520.28,8258.43 18496.84,8235 18425.28,8235 18380.28,8280
-6V_VSH2: C159.1 C160.1 C163.2 C164.2 D50.1 U26.5 U26.8 | length 1007.9
  Top Layer w10: C160.1@10705,8570 10715,8560 D50.1@10715,8355.83 10854.17,8355.83 10930,8280 ; U26.5@10993.23,8360 10993.23,8343.23 10930,8280 ; C164.2@11235,8355.04 11230.04,8360 U26.8@11070,8360 11070,8258.43 11046.57,8235 10975,8235 10930,8280
-6V_WSH1: C74.1 C75.1 C78.2 C79.2 D22.1 U12.5 U12.8 | length 1007.9
  Top Layer w10: C75.1@19655,8595 19665,8585 D22.1@19665,8380.83 19804.17,8380.83 19880,8305 ; U12.5@19943.23,8385 19943.23,8368.23 19880,8305 ; C79.2@20185,8380.04 20180.04,8385 U12.8@20020,8385 20020,8283.43 19996.57,8260 19925,8260 19880,8305
-6V_WSH2: C184.1 C185.1 C188.2 C189.2 D58.1 U30.5 U30.8 | length 1007.9
  Top Layer w10: C185.1@12170.28,8570 12180.28,8560 D58.1@12180.28,8355.83 12319.45,8355.83 12395.28,8280 ; U30.5@12458.5,8360 12458.5,8343.23 12395.28,8280 ; C189.2@12700.28,8355.04 12695.32,8360 U30.8@12535.28,8360 12535.28,8258.43 12511.84,8235 12440.28,8235 12395.28,8280